# Altium PCB Car Power Supply 2x Line v2.0.PcbDoc
Units mm, origin at the board's own origin, x right, y up, seen from the top; angles counter-clockwise.
Board outline 57 x 37 mm, 2 copper layers (Top Layer, Bottom Layer); 15 components, 8 nets, 38 pads, 0 vias.
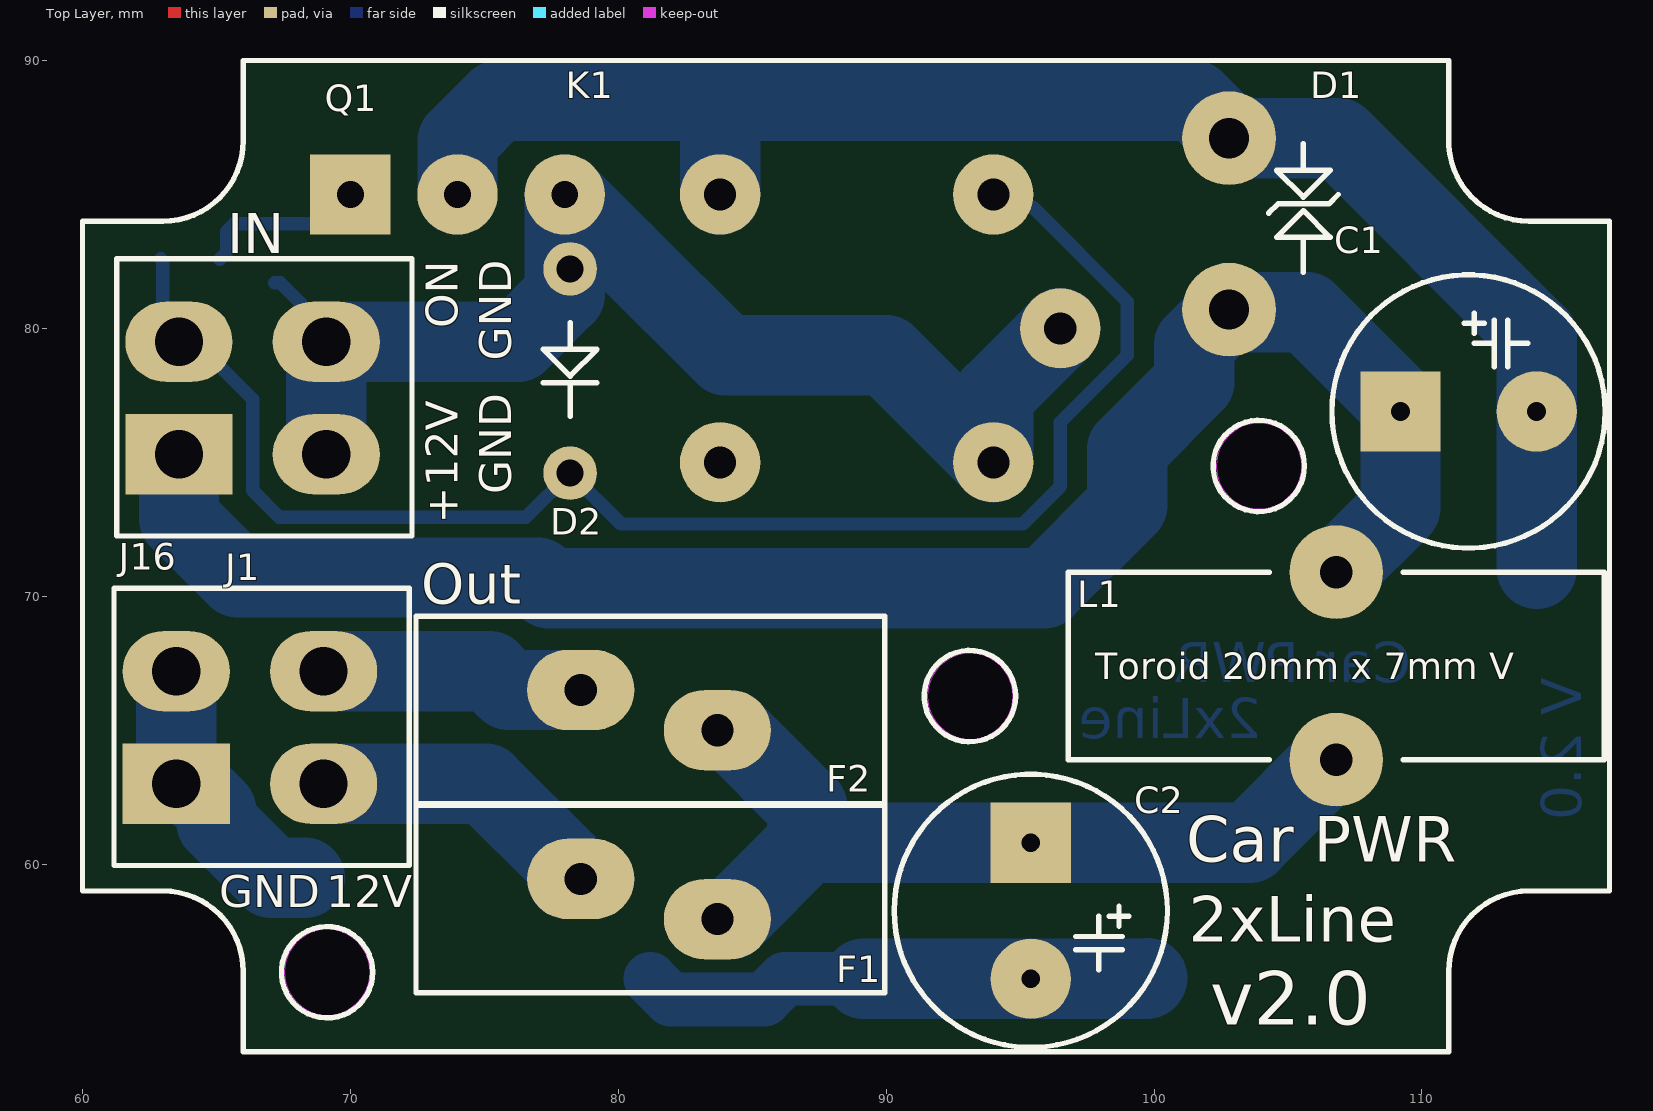
[diagram p0: Top Layer view]
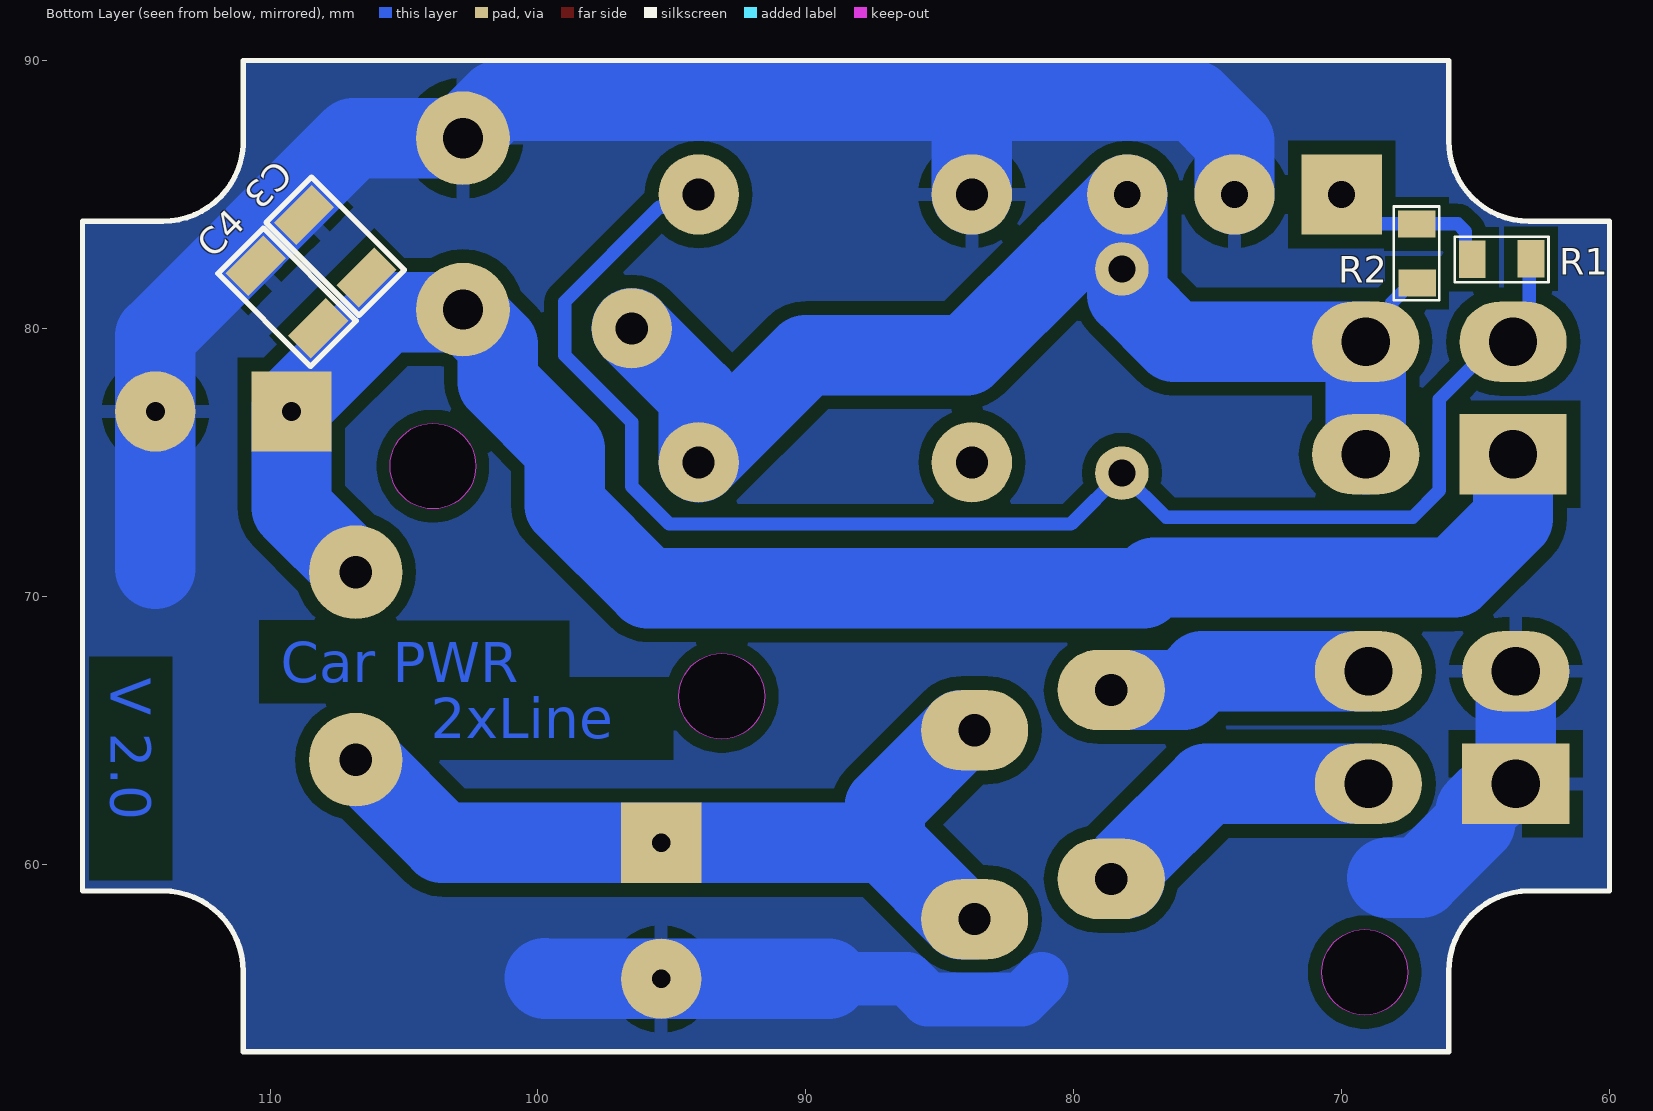
[diagram p1: Bottom Layer view, seen from below]
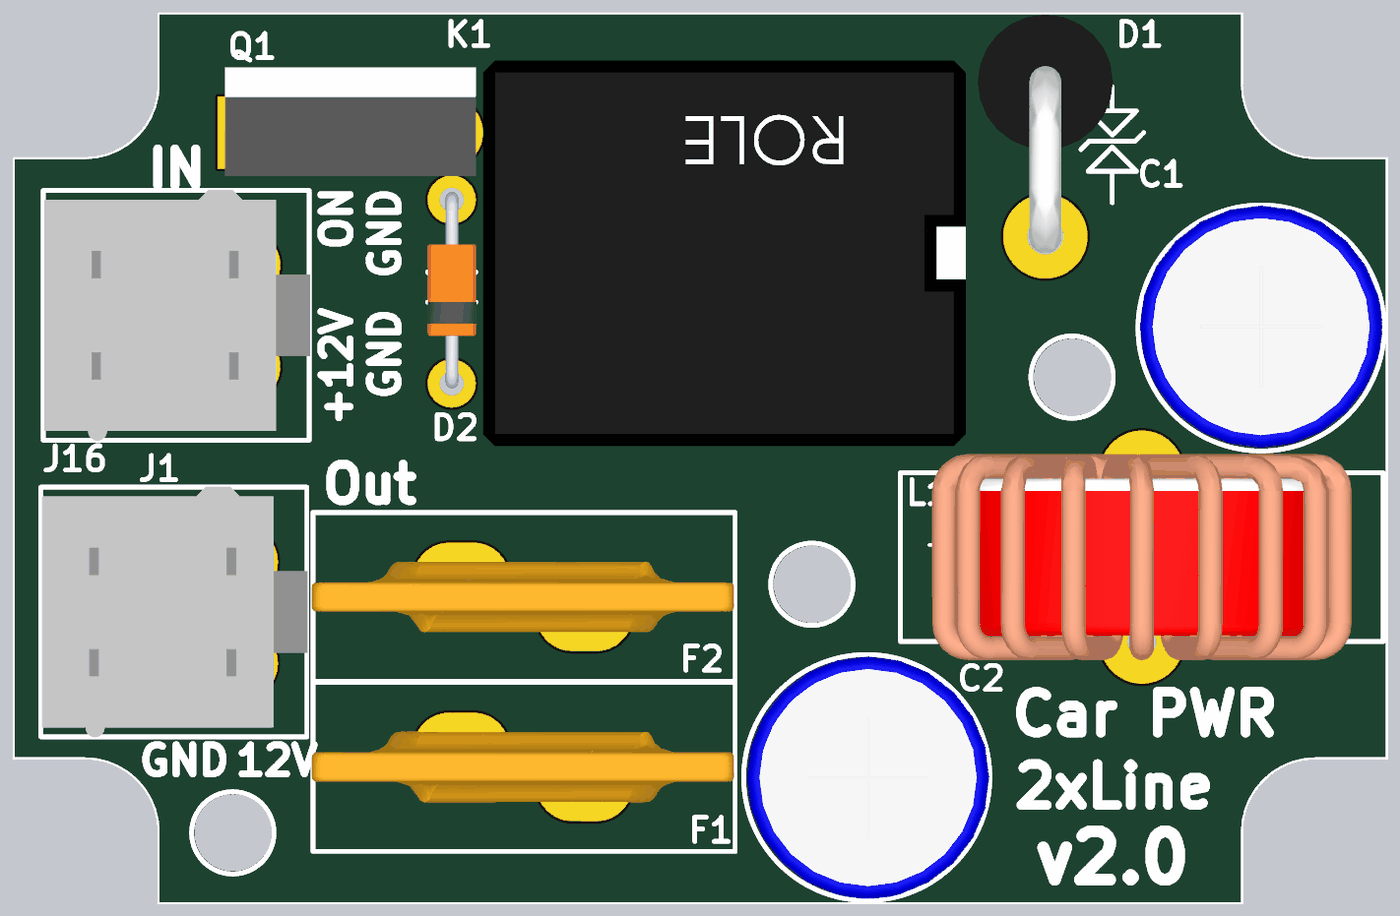
[diagram p2: 3D render of the assembled board from above, using the file's embedded part models]
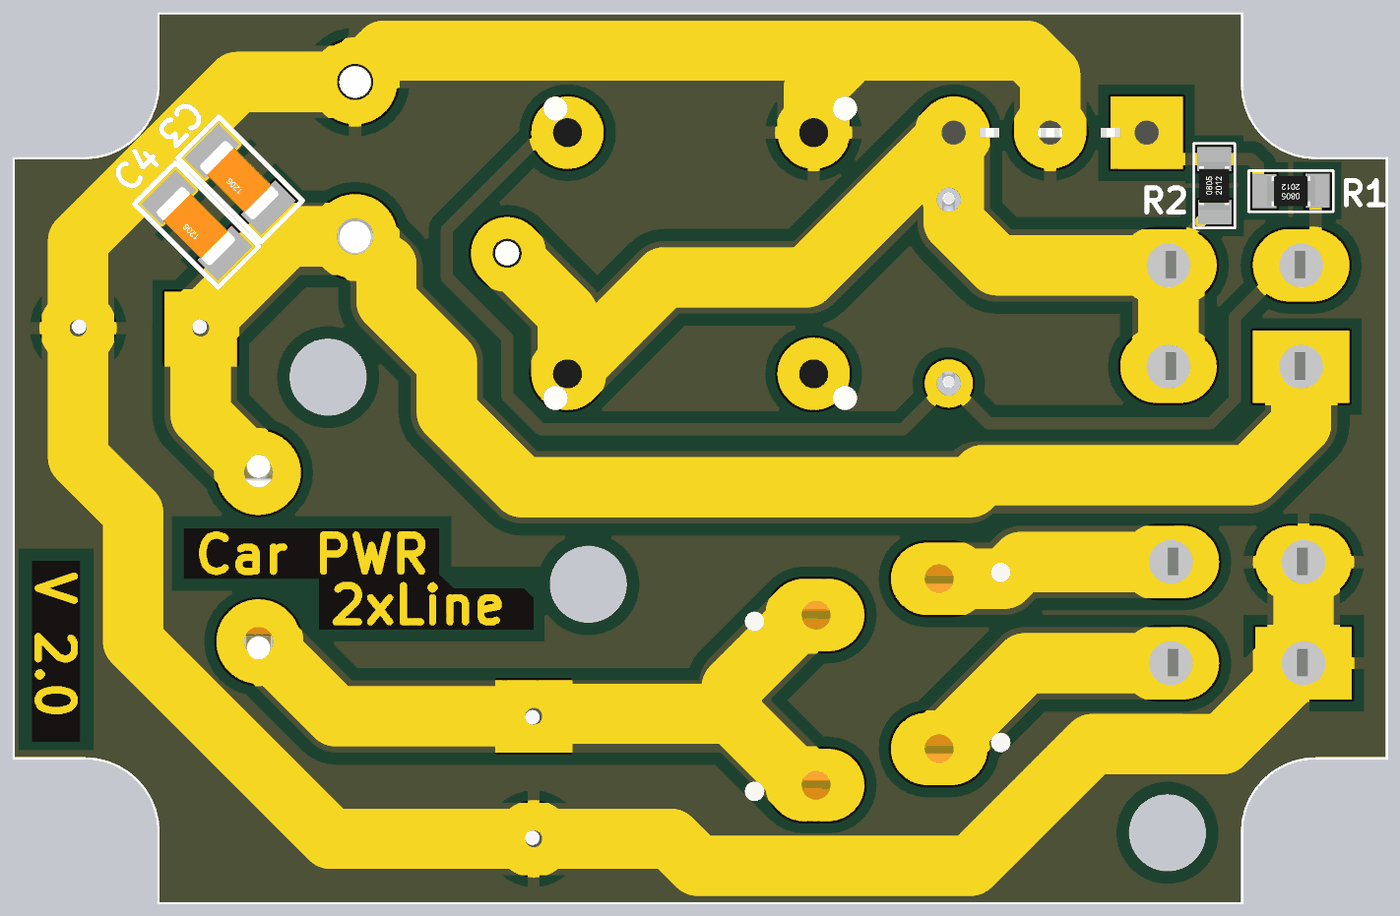
[diagram p3: 3D render of the assembled board from below, using the file's embedded part models]

## Layer stack, top to bottom
Top Solder: solder mask 0.0102, Solder Resist, Dk 3.5
Top Layer: signal copper 0.0356
Dielectric 1: dielectric 0.32, FR-4, Dk 4.8
Bottom Layer: signal copper 0.0356
Bottom Solder: solder mask 0.0102, Solder Resist, Dk 3.5

## Board outline
60,59 63,59 cw(c63,56) 66,56 66,53 111,53 111,56 cw(c114,56) 114,59 117,59 117,84 114,84 cw(c114,87) 111.002,87.115 111.002,89.998 111,90 66,90 66,87 cw(c63,87) 63,84 60,84
cut-out: 67.537,55.969 ccw(c69.137,55.969) 69.137,54.369 ccw(c69.137,55.969) 70.737,55.969 ccw(c69.137,55.969) 69.137,57.569 ccw(c69.137,55.969)
cut-out: 102.32,74.861 ccw(c103.92,74.861) 103.92,73.261 ccw(c103.92,74.861) 105.52,74.861 ccw(c103.92,74.861) 103.92,76.461 ccw(c103.92,74.861)
cut-out: 91.538,66.272 ccw(c93.138,66.272) 93.138,64.672 ccw(c93.138,66.272) 94.738,66.272 ccw(c93.138,66.272) 93.138,67.872 ccw(c93.138,66.272)

## Design rules (kind name [scope] priority, off if disabled: settings)
Clearance [All] p1: gap=0.5 ignorepadtopadclearanceinfootprint=FALSE
ComponentClearance [All] p1: gap=0.01 collisioncheckmode=3 verticalgap=0.2 showdistances=FALSE
Height [All] p1: minheight=0 maxheight=35 prefheight=13
HoleSize [All] p1: absolutevalues=TRUE maxlimit=3.2 minlimit=0.4 maxpercent=80.000 minpercent=20.000
HoleToHoleClearance [All] p1: gap=0.2 allowstackedmicrovias=TRUE
PlaneClearance [All] p1: clearance=0.5
PlaneConnect [All] p1: planeconnectstyle=Relief reliefexpansion=0.508 reliefentries=4 reliefconductorwidth=0.5 reliefairgap=0.5
PolygonConnect [All] p1: connectstyle=Relief reliefconductorwidth=0.5 reliefentries=4 polygonreliefangle="90 Angle" airgapwidth=0.5
RoutingVias [All] p1: holewidth=0.7 width=1.5 viastyle="Through Hole" minholewidth=0.4 minwidth=0.4 maxholewidth=3.2 maxwidth=7
SilkToSilkClearance [All] p1: silktosilkclearance=0.05
SilkToSolderMaskClearance [IsPad] p1: minsilkscreentomaskgap=0.2 clearancetoexposedcopper=TRUE
SolderMaskExpansion [All] p1: expansion=0.1 istentingtop=FALSE
Width [All] p1: maxlimit=3 minlimit=0.2 preferedwidth=0.5
22 further rules are at their usual default settings.

## Components (designator, comment, footprint, x,y, rotation, side; value= is the part's Value field where it differs from the comment)
C1 "25V 1000uF" "Cap E p5.08mm D10.2mm (3p)" 109.2,76.9 r0 top
C2 "25V 1000uF" "Cap E p5.08mm D10.2mm (3p)" 95.4,60.8 r270 top
C3 "10nF" "SMD 1206 (3216)" 106.4,81.9 r45 bottom
C4 "100nF" "SMD 1206 (3216)" 108.2,80 r45 bottom
D1 "1.5KE20CA" "TVS diode DO-201 V" 102.8,87.1 r270 top
D2 "1N5819" "Diode DO-35" 78.2,82.22 r270 top value=1N5822
F1 "A" "Fuse RGE1100" 83.7,58.7 r270 top
F2 "A" "Fuse RGE1100" 83.7,65.75 r270 top
J1 "connector" "Molex Mini-Fit Jr - 4Pin V" 63.5,67.2 r0 top
J16 "connector" "Molex Mini-Fit Jr - 4Pin V" 63.6,79.5 r0 top
K1 "SRA-12VDC-CL" SRA-12VDC-CL 96.5,80 r180 top
L1 "Inductor V" "Toroid V D20 W7" 106.8,70.9 r270 top value=700nH
Q1 "IRF3205 PBf" "TO220-2 HighPower" 70,85 r270 top
R1 "1k Om" "SMD 0805 (2012)" 63,82.6 r0 bottom
R2 "10k Om" "SMD 0805 (2012)" 67.175,81.775 r90 bottom

## Footprints (in the part's own frame and the unit in brackets; to place one, negate y for a bottom-side part, rotate by r counter-clockwise, add the part's x,y. Pads: shape width x height; smd on the part's side, far side on the other; paste and mask are expansions set on the pad)
"Cap E p5.08mm D10.2mm (3p)" [mm] "D 10.2mm; H 17.5mm, Hole: 0.7mm"
  rect 3x3 hole 0.7: 1(0,0)
  round 3 hole 0.7: 2(5.08,0)
  silkscreen extent -2.56,-5.1 7.64,5.1, body extent -2.49,-4.97 7.57,5.08, height 16.53
"Diode DO-35" [mm] "p7.62mm"
  round 2 hole 1: A(0,0) K(7.62,0)
  silkscreen extent 2,-1 5.5,1, body extent -0.32,-1 7.82,1.02, height 2.21
"Fuse RGE1100" [mm] "Resettable 11A"
  oval 3x4 hole 1.2: 1(0.75,0) 2(-0.75,-5.1)
  silkscreen extent -3.5,-11.25 3.5,6.25, body extent -1.46,-11.3 1.46,6.2, height 26.01
"Molex Mini-Fit Jr - 4Pin V" [mm] "Molex Mega-Fit"
  rect 4x3 hole 1.8: 1(0,-4.2)
  oval 4x3 hole 1.8: 2(0,0) 3(5.5,-4.2) 4(5.5,0)
  silkscreen extent -2.32,-7.25 8.7,3.1, body extent -2.27,-7.27 8.73,3.12, height 12.8
"SMD 0805 (2012)" [mm]
  rect 1x1.4 smd: 1(-0.075,0) 2(2.125,0.025)
  silkscreen extent -0.72,-0.82 2.78,0.87, body extent 0.03,-0.6 2.03,0.65, height 0.45
"SMD 1206 (3216)" [mm]
  rect 1.2x2 smd: 1(0,0) 2(3.3,0)
  silkscreen extent -0.8,-1.2 4.1,1.2, body extent 0.05,-0.75 3.25,0.85, height 1
SRA-12VDC-CL [mm]
  round 3 hole 1.2: 1(12.7,5) 2(0,0) 3(12.7,-5) 4(2.5,-5) 5(2.5,5)
  body extent -3,-8 17,8, height 15
"TO220-2 HighPower" [mm]
  rect 3x3 hole 1: 1(0,0)
  round 3 hole 1: 2(0,4) 3(0,8)
  body extent -2.7,-1.2 1.8,9.2, height 19
"Toroid V D20 W7" [mm] "10mm Black ring TEC.ORG"
  round 3.5 hole 1.2: 1(0,0) 2(7,0)
  silkscreen extent 0,-10 7,10, body extent -0.77,-8.69 7.77,8.69, height 20.82
"TVS diode DO-201 V" [mm] "6p, p15.24mm"
  round 3.5 hole 1.5: 1(0,0) 2(6.4,0)
  silkscreen extent 0.2,1.47 5,4.07, body extent -2.8,-2.8 7.09,2.8, height 15.69

## Part data
C1 C2: library part "Cap E 1000mF x 25V", "Capacitor"
C3 C4: library part "Cap Ceramic SMD (All)", "Capacitor"
D1: library part "TVS 1.5KE20CA", "1500W Transil (TVS Diode)", Pulse Power=1500W, Breakdown V="min 19 max 21", Load A=5, PackageReference=DO-201, Stand-Off V=17.1
D2: library part "D Shotki All", "Shotki  Diode", PackageReference=DO-201
F1 F2: library part Fuse, "Round fuse"
J1 J16: library part "Molex Mini-Fit Jr - 4 pin", "Right, Dbl line, Female"
K1: "Single-Pole Dual-Throw Relay", DataSheet=http://tec.org.ru/_bd/12/1208_SRA.pdf, I (AC = 240 V)=15-20A, I (DC = 30 V)=10A, Name=SRA-12VDC-CL, R обм="240 Om", U="12 V"
L1: "Inductor Vertical", Code_IEC=1005, Code_JEITA=0402, LatestRevisionDate=29-May-2009, LatestRevisionNote="IPC-7351 Footprint Added.", PackageDescription="Chip Inductor", PackageReference=0402-A, Published=8-Jun-2000, Publisher="Altium Limited"
Q1: library part IRF3205, "N-Channel 55V - 0.008Ω - 110A", I d - Drain current (continuous) at TC = 25°C="110 A", I d - Drain current (continuous) at TC = 100°C="80 A", C ISS Входная емкость="3247 pF", C OSS Выходная емкость="781 pF", DataSheet=http://tec.org.ru/_bd/2/223_IRF3205.pdf, Monufacturer=IOR, Name="IRF3205 PBf", RDS Сопротивление Сток-Исток="0.008 Om", URL=http://tec.org.ru/board/49-1-0-223, V DSS (v)=55V, VGS Макс напр на гейте="+-20 V", VGS Порог Открытия="+2....+4 V"
R1 R2: library part "Res All Types"

## Nets (pads, with @x,y where several pads share a name; then routed paths per layer and width w, separated by ;. In a path a pad name is that pad's centre, name@x,y a point inside that pad or via, vN(x,y) a via of type N, cw(c..) or ccw(c..) an arc to the next point about the centre after c; other vN are vias at no path point)
+12V: C1.1 C3.1 C4.1 D1.2 J16.1 L1.1 | length 64
  Bottom Layer w3: J16.1@63.6,75 63.6,72.9 65.8,70.7 77,70.7 77.4,70.3 95.9,70.3 99,73.4 99,75.5 101.5,78 101.5,79.4 D1.2 ; D1.2@102.8,80.565 D1.2 ; L1.1 109.2,73.3 C1.1 109.2,77.1 105.696,80.604 102.896,80.604 D1.2
"+12V No Noise 1": F1.2 J1.3 | length 11.4
  Bottom Layer w3: J1.3 75.05,63 78.1,59.95 78.1,59.45 F1.2
"+12V No Noise 2": F2.2 J1.4 | length 9.9
  Bottom Layer w3: J1.4 75.2,67.2 75.9,66.5 78.1,66.5 F2.2
GND: C1.2 C2.2 C3.2 C4.2 D1.1 J1.1 J1.2 K1.3 Q1.2 | length 88.8
  Bottom Layer w2: 81.187,55.72 81.957,54.95 85.443,54.95 86.213,55.72 89.152,55.72
  Bottom Layer w3: J1.2 J1.1 64,63 65,62 65,61.55 67.05,59.5 68.292,59.5 ; Q1.2 74,87 75.5,88.5 84,88.5 ; K1.3 83.8,88.3 84,88.5 ; 89.152,55.72 C2.2 99.72,55.72 99.75,55.75 ; D1.1 D1.1@102.9,87.1 ; 114.28,71.03 C1.2 114.28,79.72 106.9,87.1 D1.1@102.9,87.1 ; 84,88.5 99,88.5 101.5,88.5 D1.1@102.9,87.1
"GND In": D2.A J16.3 J16.4 K1.2 K1.5 Q1.3 R2.1 | length 46.9
  Bottom Layer w0.5: R2.1 67.375,81.7 68.122,80.953 68.122,80.178 J16.4@69.1,79.2
  Bottom Layer w3: J16.3 J16.4@69.1,79.2 ; J16.4 76.243,79.5 78,81.257 78,82.22 Q1.3 80.2,82.8 84,79 90,79 K1.5 94,77.5 K1.2
NetC2_1: C2.1 F1.1 F2.1 L1.2 | length 31.4
  Bottom Layer w3: F1.1 84.2,57.95 87.05,60.8 ; F2.1 84.2,65 87.05,62.15 87.05,60.8 ; L1.2 106.665,63.9 103.565,60.8 C2.1 87.05,60.8
NetQ1_1: Q1.1 R1.2 R2.2 | length 6.3
  Bottom Layer w0.5: R1.2 65.375,82.825 65.375,83.607 65.668,83.9 R2.2 68.9,83.9 Q1.1
"ON Ingition": D2.K J16.2 K1.4 R1.1 | length 57.8
  Bottom Layer w0.5: R1.1 63,82.525 63,79.8 63.6,79.2 64.5,79.2 66.35,77.35 66.35,73.95 67.35,72.95 76.55,72.95 D2.K 80.1,72.7 95.1,72.7 96.5,74.1 96.5,76.5 99,79 99,81 95.478,84.522 94.478,84.522 K1.4
pads on no net: K1.1

## Polygon pours and split planes (outlines as drawn)
GND on Bottom Layer "GND_L02_P000" (solid, pour order 0): 60,59 63,59 cw(c63,56) 66,56 66,53 111,53 111,56 cw(c114,56) 114,59 117,59 117,84 114,84 cw(c114,87) 111.002,87.115 111.002,89.998 111,90 66,90 66,87 cw(c63,87) 63,84 60,84

## Other copper
Top Layer:
  text ".Layer_Name" at 102.075,91.7 h1
Bottom Layer:
  text ".Layer_Name" at 75,92 h1
  text "V 2.0" at 115.95,66.95 h1.5 r90
  text "Car PWR" at 109.6,66.8 h1.5
  text "2xLine" at 104,64.7 h1.5

## Silkscreen, mask and mechanical layers (free items; w line width, h text height)
Top Overlay:
  circle w0.2: c69.131,55.967 r1.706
  circle w0.2: c103.907,74.864 r1.706
  circle w0.2: c93.125,66.275 r1.706
  lines w0.2: 60,84 60,59 63,59 cw(c63,56) 66,56 66,53 111,53 111,56 cw(c114,56) 114,59 117,59 117,84 114,84 cw(c114,87) 111.002,87.115 111.002,89.998 111,90 66,90 66,87 cw(c63,87) 63,84 60,84 ; 60,84 60,84
  text ".Layer_Name" at 102.1,91.7 h1
  text "IN" at 65.4,82.8 h1.5
  text "ON" at 74,80 h1.2 r90
  text "GND" at 76,78.8 h1.2 r90
  text "GND" at 76,73.8 h1.2 r90
  text "+12V" at 74,72.7 h1.2 r90
  text "Out" at 72.638,69.728 h1.5
  text "Car PWR" at 101.2,60.1 h1.7
  text "GND" at 65.1,58.4 h1.2
  text "12V" at 69.1,58.4 h1.2
  text "2xLine" at 101.3,57.1 h1.7
  text "v2.0" at 102.1,54 h2
Bottom Overlay:
  lines w0.2: 111,90 66,90 66,87 cw(c63,87) 63,84 60,84 60,59 63,59 cw(c63,56) 66,56 66,53 111,53 111,56 cw(c114,56) 114,59 117,59 117,84 114,84 cw(c114,87) 111.002,87.115 111.002,89.998
  text ".Layer_Name" at 75,92 h1
Top Solder:
  text ".Layer_Name" at 102.1,91.7 h1
Bottom Solder:
  region: 109.9,68.6 109.9,66.5 104.3,66.5 104.3,64.4 95.4,64.4 95.4,65.7 95.8,66.1 98.7,66.1 99.325,66.675 99.325,68.6
  region: 116.2,59.75 116.2,67.25 114.2,67.25 114.2,59.75
  lines w2.5: 63.5,67.2 63.5,63 ; 63.6,75.3 63.6,72.9 65.7,70.8 76.8,70.8 77.3,70.3 95.9,70.3 99,73.4 99,75.5 101.5,78 101.5,79.5 ; 69,63 75.05,63 78.6,59.45 ; 69,67.2 75.2,67.2 75.9,66.5 78.6,66.5 ; 69.1,75.3 69.1,79.5 76.2,79.5 78,81.3 78,85 78.1,85 84.1,79 90,79 94,75 94,77.5 96.5,80 ; 74,85 74,87.4 75,88.4 101.6,88.4 102.9,87.1 107.7,87.1 114.28,80.52 114.28,71.53 112,69.25 112,63.9 103.82,55.72 89.72,55.72 88.6,54.6 77.3,54.6 72.25,59.65 66.85,59.65 63.5,63 ; 82.2,88.4 83.8,86.8 83.8,85 ; 83.7,65 84.2,65 87.2,62 87.2,60.9 ; 84.3,58 87.2,60.9 ; 101.7,79.6 102.8,80.7 105.6,80.7 109.2,77.1 109.2,73.3 106.8,70.9 ; 106.8,63.9 106.7,63.9 103.6,60.8 95.4,60.8 95.3,60.9 87.2,60.9 ; 63.5,63 63.5,63
  text ".Layer_Name" at 75,92 h1
Mechanical 2:
  text "57 x 37 mm" at 61,95.25 h1
  text "T O P" at 90.7,94 h2.7
  text "G1031B Case 64x44x32mm" at 60.975,93.475 h1
  text ".Pcb_File_Name_No_Path" at 60.925,91.425 h1
Mechanical 3:
  text "57 x 37 mm" at 117.1,95.25 h1
  text "T O P" at 87.8,94.1 h2.7
  text "G1031B Case 64x44x32mm" at 117.075,93.475 h1
  text ".Pcb_File_Name_No_Path" at 117.025,91.425 h1

## Dimensions
60,53 to 117,53 on Mechanical 3
60,90 to 60,53 on Mechanical 3
60,90 to 60,53 on Mechanical 2
60,53 to 117,53 on Mechanical 2

## Text inside footprints (layer, text, board x,y; h text height)
L1: Top Overlay "Toroid 20mm x 7mm V" at 97.8,66.9 h1